# Altium PCB Sensor PCB.PcbDoc
Units mil, origin at the board's own origin, x right, y up, seen from the top; angles counter-clockwise.
Board outline 695 x 450 mil, 2 copper layers (Top Layer, Bottom Layer); 4 components, 4 nets, 16 pads, 0 vias.
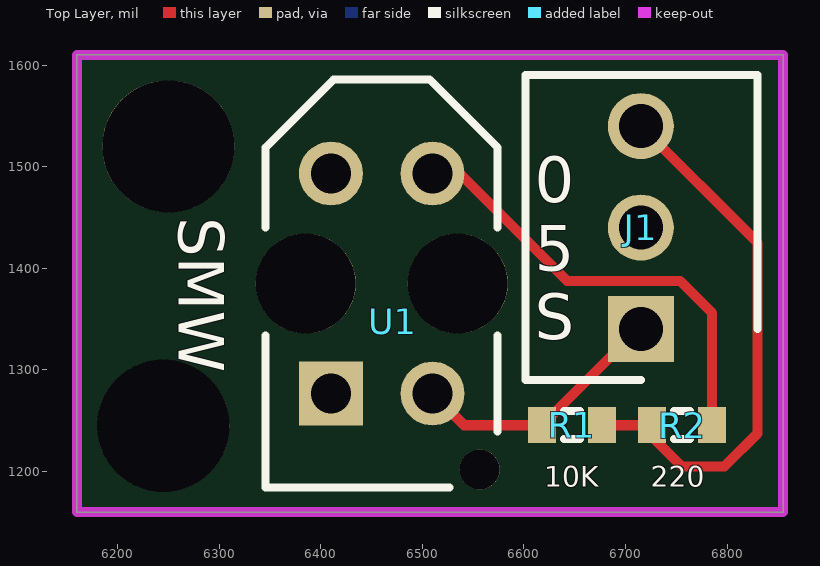
[diagram p0: Top Layer view]
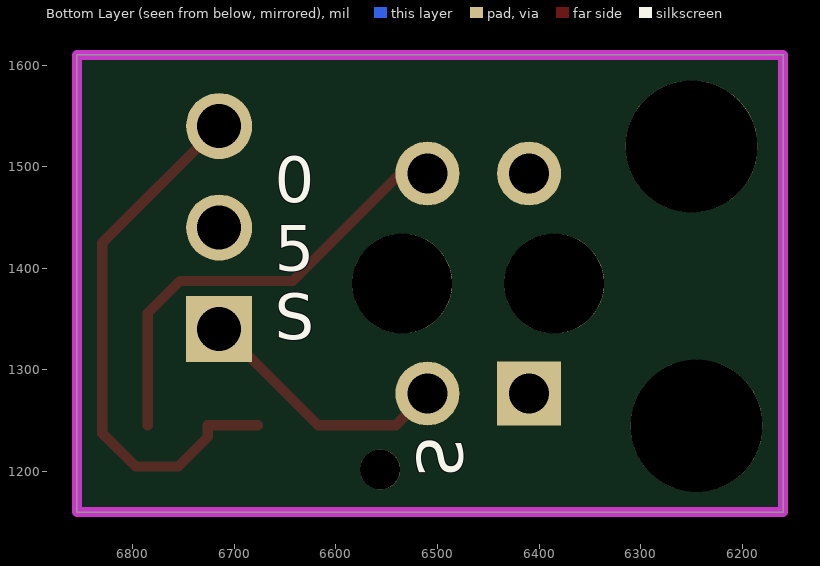
[diagram p1: Bottom Layer view, seen from below]

## Layer stack, top to bottom
Top Solder: solder mask 0.4, Solder Resist, Dk 3.5
Top Layer: signal copper 1.4
Dielectric 1: dielectric 12.6, FR-4, Dk 4.8
Bottom Layer: signal copper 1.4
Bottom Solder: solder mask 0.4, Solder Resist, Dk 3.5

## Board outline
6160,1160 6855,1160 6855,1610 6160,1610

## Design rules (kind name [scope] priority, off if disabled: settings)
Clearance [All] p1: gap=10
PolygonConnect [All] p1: connectstyle=Relief reliefconductorwidth=10 reliefentries=4 polygonreliefangle="90 Angle" airgapwidth=10
RoomDefinition "Sensor Schematic" [InComponentClass('Sensor Schematic')] p1: confinementstyle=ConfineIn formatcopy=TRUE lockcomponents=FALSE outline 6160,1160 6855,1160 6855,1610 6160,1610
RoutingVias [All] p1: holewidth=28 width=50 viastyle="Through Hole" minholewidth=28 minwidth=50 maxholewidth=28 maxwidth=50
SolderMaskExpansion [All] p1: expansion=4
Width [All] p1: maxlimit=10 minlimit=10 preferedwidth=10
30 further rules are at their usual default settings.

## Classes and differential pairs
component class "Sensor Schematic": J1 R1 R2

## Components (designator, comment, footprint, x,y, rotation, side; value= is the part's Value field where it differs from the comment)
J1 "22-27-2031" SHDR3W64P0X254_1X3_762X580X1170P 6715,1340 r90 top
R1 "Res3" J1-0603 6647.24,1245.54 r180 top
R2 "Res3" J1-0603 6755.67,1245.54 r0 top
U1 "TCRT5000L" XDCR_TCRT5000L 6460,1385 r90 top

## Footprints (in the part's own frame and the unit in brackets; to place one, negate y for a bottom-side part, rotate by r counter-clockwise, add the part's x,y. Pads: shape width x height; smd on the part's side, far side on the other; paste and mask are expansions set on the pad)
J1-0603 [mm] "Chip Resistor, Body 1.6x0.8mm, IPC High Density"
  rect 0.7x0.9 smd: 1(-0.75,0) 2(0.75,0)
  silkscreen extent -0.2,-0.35 0.2,0.35, body extent -0.85,-0.48 0.85,0.48, height 0.9
SHDR3W64P0X254_1X3_762X580X1170P [mm]
  rect 1.65x1.65 / inner round 1.65 / far side rect 1.65x1.65 hole 1.1: 1(0,0)
  round 1.65 hole 1.1: 2(2.54,0) 3(5.08,0)
  silkscreen extent -1.27,-2.92 6.35,2.88
XDCR_TCRT5000L [mm]
  rect 1.6x1.6 hole 1: 1(-2.75,1.27)
  round 1.6 hole 1: 2(-2.75,-1.27) 3(2.75,-1.27) 4(2.75,1.27)
  round 1 hole 1 unplated: None(-4.65,-2.45)
  round 2.5 hole 2.5 unplated: None(0,1.9) None(0,-1.9)
  silkscreen extent -5.1,-2.9 5.1,2.9

## Part data
J1: "3way straight PCB header w/friction lock Molex KK Series, Series Number 6410, 2.54mm Pitch 3 Way 1 Row Straight PCB Header, Solder Termination, 4A"
R1 R2: "Resistor"
U1: "TCRT5000 Series 940 nm 100 mA 60 mA Transistor Output Reflective Optical Sensor"

## Free pads (board coordinates)
  round 130 hole 130: 2(6245,1245) 2(6250,1520)

## Nets (pads, with @x,y where several pads share a name; then routed paths per layer and width w, separated by ;. In a path a pad name is that pad's centre, name@x,y a point inside that pad or via, vN(x,y) a via of type N, cw(c..) or ccw(c..) an arc to the next point about the centre after c; other vN are vias at no path point)
+5V: J1.2 U1.1 U1.4
GND: J1.3 R1.1 R2.1 | length 540.4
  Top Layer w10: R1.1 R2.1 6726.15,1233.85 6755,1205 6797.37,1205 6830,1237.63 6830,1425 J1.3
NetR2_2: R2.2 U1.3 | length 442.5
  Top Layer w10: U1.3 6536.73,1493.27 6642.52,1387.48 6753.69,1387.48 6785.2,1355.97 R2.2
SIG: J1.1 R1.2 U1.2 | length 257
  Top Layer w10: U1.2 6541.19,1245.54 R1.2 6712.17,1340 J1.1
pads on no net: U1.None

## Polygon pours and split planes (outlines as drawn)
+5V on Top Layer "NONET_L01_P006" (solid, remove dead copper, shelved, pour order 6): 6160,1160 6855,1160 6855,1610 6160,1610
GND on Bottom Layer "NONET_L02_P007" (solid, remove dead copper, shelved, pour order 7): 6160,1160 6855,1160 6855,1610 6160,1610

## Keep-outs
Keep-Out Layer:
  the board outline again, w10

## Silkscreen, mask and mechanical layers (free items; w line width, h text height)
Top Overlay:
  text "SMW" at 6260,1450 h45 r270
  text "0 / 5 / S" at 6610.43,1330 h45
  text "10K" at 6620,1185 h20
  text "220" at 6725,1185 h20
Bottom Overlay:
  text "0 / 5 / S" at 6660.43,1330 h45
  text "S" at 6520,1195 h45 r90